# Altium PCB PCB1.PcbDoc
Units mil, origin at the board's own origin, x right, y up, seen from the top; angles counter-clockwise.
Board outline 3838.58 x 1771.65 mil, 2 copper layers (Top Layer, Bottom Layer); 17 components, 11 nets, 40 pads, 0 vias.
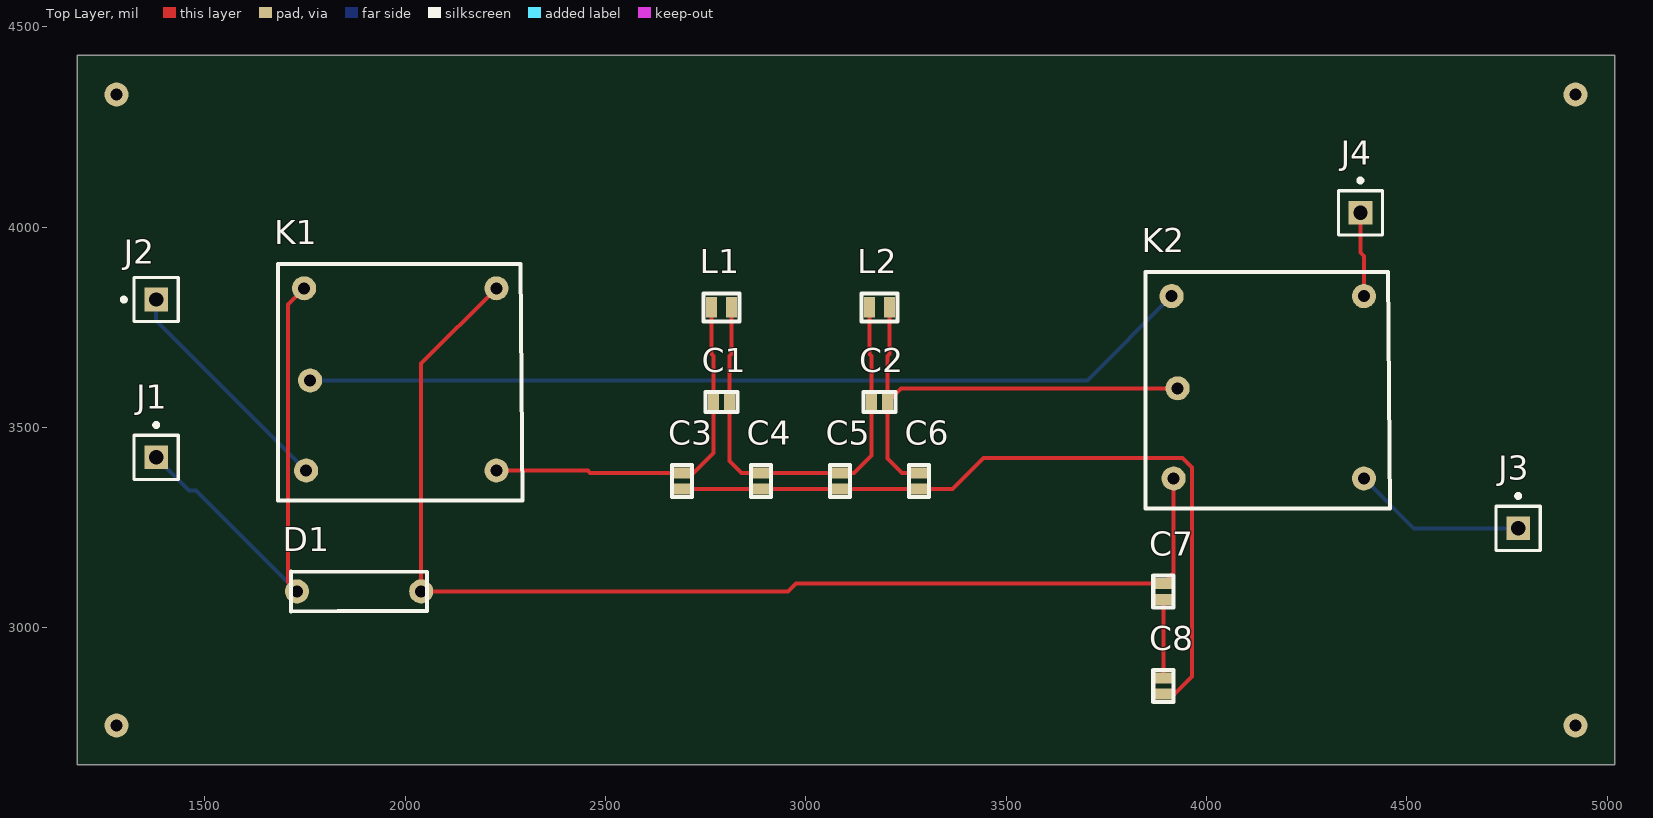
[diagram p0: Top Layer view]
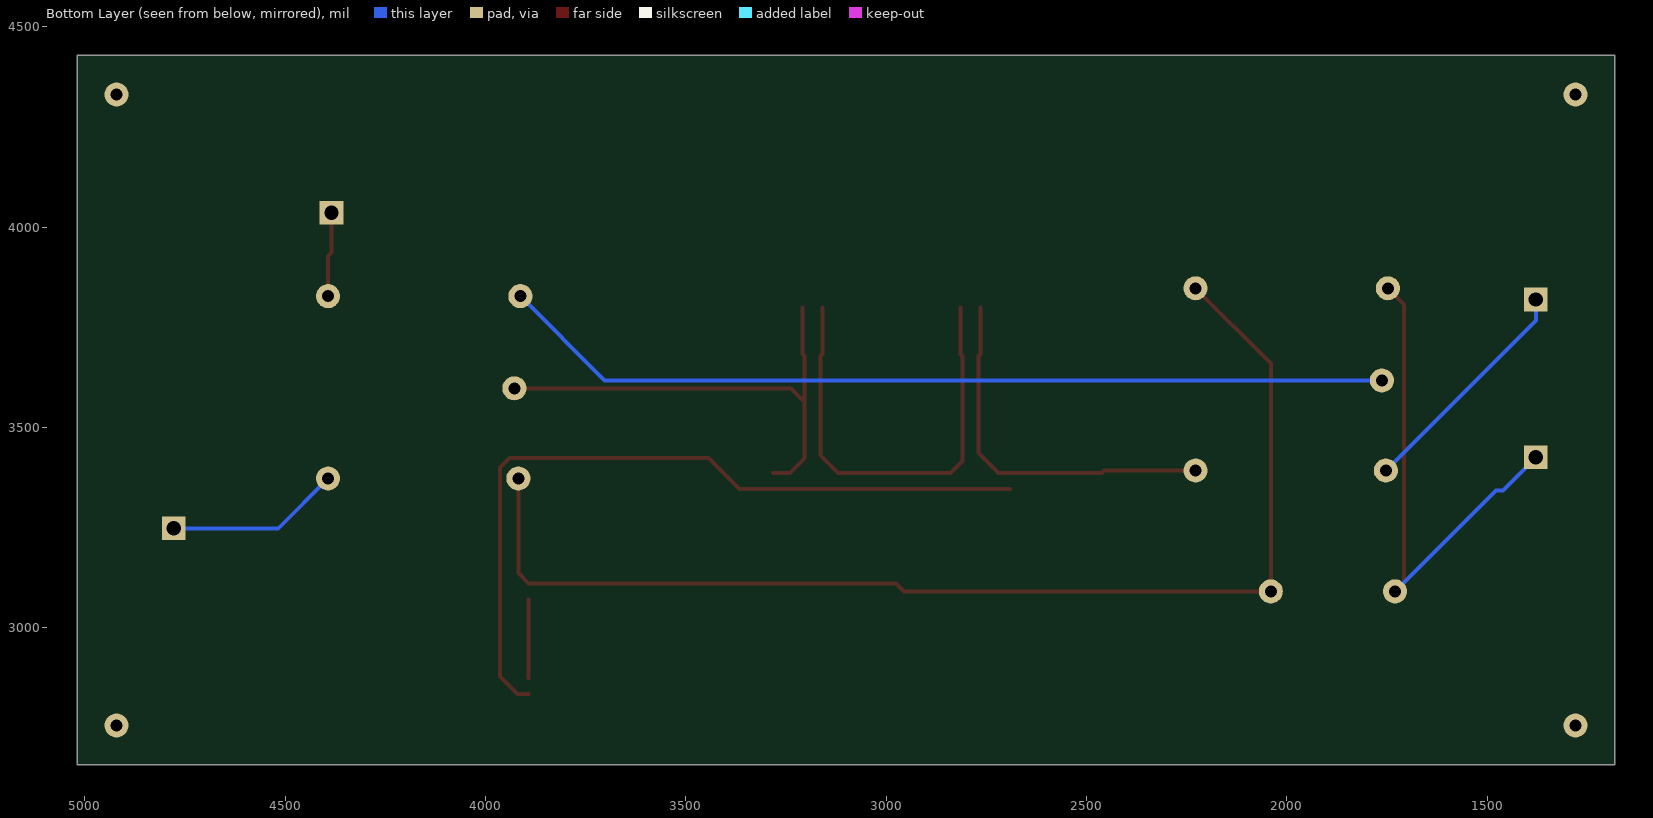
[diagram p1: Bottom Layer view, seen from below]
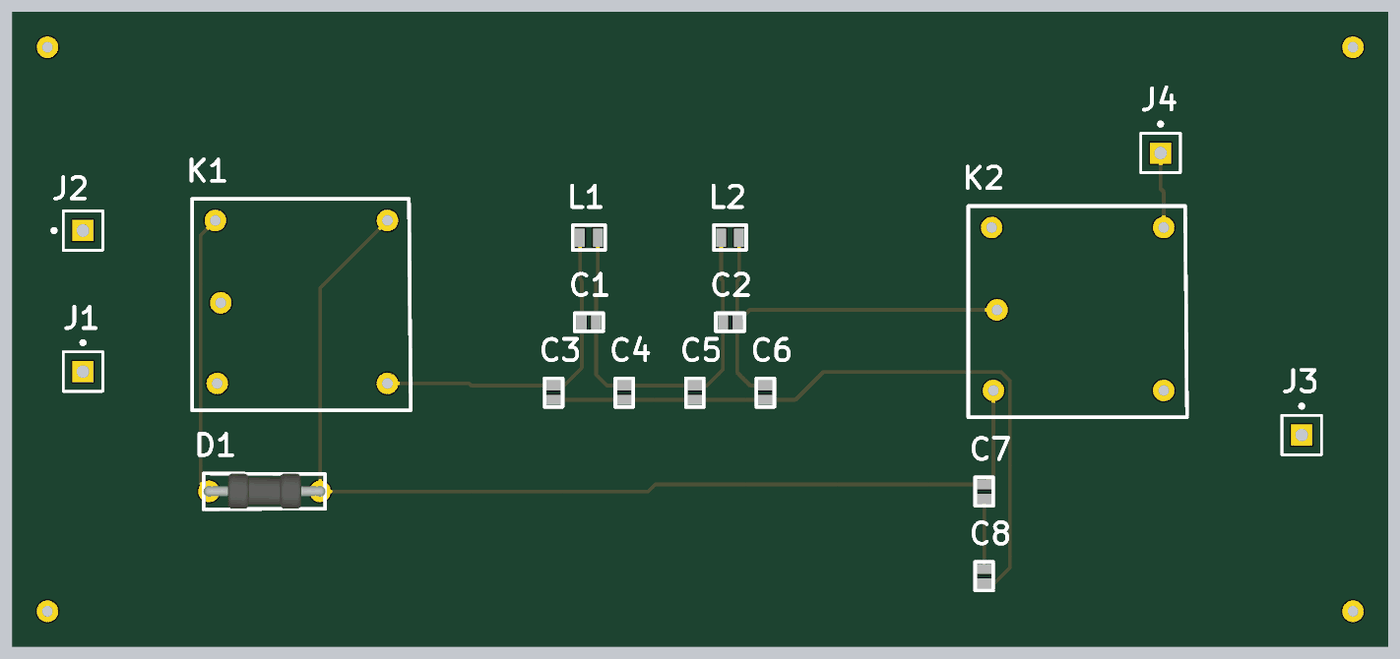
[diagram p2: 3D render of the assembled board from above, using the file's embedded part models]

## Layer stack, top to bottom
Top Solder: solder mask 0.4, Solder Resist, Dk 3.5
Top Layer: signal copper 1.4
Dielectric 1: dielectric 12.6, FR-4, Dk 4.8
Bottom Layer: signal copper 1.4
Bottom Solder: solder mask 0.4, Solder Resist, Dk 3.5

## Board outline
1181.1,2657.48 1181.1,4429.13 5019.69,4429.13 5019.69,2657.48

## Design rules (kind name [scope] priority, off if disabled: settings)
Clearance [All] p1: gap=10 ignorepadtopadclearanceinfootprint=FALSE
PolygonConnect [All] p1: connectstyle=Relief reliefconductorwidth=10 reliefentries=4 polygonreliefangle="90 Angle" airgapwidth=10
RoomDefinition Э3 [InComponentClass('Э3')] p1: confinementstyle=ConfineIn formatcopy=TRUE lockcomponents=FALSE outline 1271.3,2755.59 4915.94,2755.59 4915.94,4330.39 1271.3,4330.39
RoutingVias [All] p1: holewidth=28 width=50 viastyle="Through Hole" minholewidth=28 minwidth=50 maxholewidth=28 maxwidth=50
SolderMaskExpansion [All] p1: expansion=4 istentingtop=FALSE
SupplyNets "Schematic Supply Nets_1" [InNet('NetK1_5')] p1: voltage=0.000
SupplyNets "Schematic Supply Nets" [InNet('GND')] p2: voltage=0.000
Width [All] p1: maxlimit=10 minlimit=10 preferedwidth=10
30 further rules are at their usual default settings.

## Components (designator, comment, footprint, x,y, rotation, side; value= is the part's Value field where it differs from the comment)
C1 "33 пФ-5%-0805" CAPACITOR_SMD0805C 2789.96,3562.99 r0 top
C2 "12 пФ-5%-0805" CAPACITOR_SMD0805C 3183.66,3562.99 r0 top
C3 "68 пФ-5%-0805" CAPACITOR_SMD0805C 2691.53,3366.14 r270 top
C4 "100 пФ-5%-0805" CAPACITOR_SMD0805C 2888.39,3366.14 r270 top
C5 "75пФ-5%-0805" CAPACITOR_SMD0805C 3085.24,3366.14 r270 top
C6 "75пФ-5%-0805" CAPACITOR_SMD0805C 3282.09,3366.14 r270 top
C7 "100пФ-5%-0805" CAPACITOR_SMD0805C 3892.32,3090.24 r270 top
C8 "100пФ-5%-0805" CAPACITOR_SMD0805C 3892.32,2854.02 r270 top
D1 "Diode 1N4007" diod 1909.99,3090.55 r180 top
J1 "Socket" PIN1 1378.5,3425.2 r0 top
J2 "Socket" PIN1 1378.5,3818.9 r90 top
J3 "Socket" PIN1 4778.15,3248.03 r0 top
J4 "Socket" PIN1 4384.45,4035.43 r0 top
K1 "Relay-SPDT" RALEY_IMO3GR 1982.87,3622.05 r0 top
K2 "Relay-SPDT" RALEY_IMO3GR 4148.23,3602.36 r0 top
L1 "0.25μH-20%-HCI1335-R25" INDUCTOR_SMD0805L 2789.96,3799.21 r90 top
L2 "0.31μH-20%-0805-R25" INDUCTOR_SMD0805L 3183.66,3799.21 r270 top value=0.31μH-20%-HCI1335-R25

## Footprints (in the part's own frame and the unit in brackets; to place one, negate y for a bottom-side part, rotate by r counter-clockwise, add the part's x,y. Pads: shape width x height; smd on the part's side, far side on the other; paste and mask are expansions set on the pad)
CAPACITOR_SMD0805C [mm]
  rect 0.7x1.3 smd: 1(-0.508,0) 2(0.508,0)
  silkscreen extent -1.02,-0.63 1.02,0.64, body extent -1,-0.63 1,0.63, height 1.3
diod [mil]
  round 60 hole 30: 1(-130,0) 2(180,0)
  silkscreen extent -144,-50 195,50, body extent -144,-50 194,48, height 207
INDUCTOR_SMD0805L [mm]
  rect 1.3x0.7 smd: 1(0,0.635) 2(0,-0.635)
  silkscreen extent -0.89,-1.14 0.89,1.14, body extent -0.86,-1.14 0.86,1.14, height 1.63
PIN1 [mm] "Connector; Plug"
  rect 1.5x1.5 hole 0.9: 1(0,0)
  silkscreen extent -1.4,-1.4 1.4,2.17
RALEY_IMO3GR [mil]
  round 60 hole 30: 1(-235,225) 2(245,225) 3(-230,-230) 4(245,-230) 5(-220,-5)
  silkscreen extent -300,-305 310,285, body extent -298,-300 308,291, height 740

## Part data
C1: library part Capacitor_SMD0805C, Manufacturer="Murata Electronics", PartNumber=GRM2165C1H330JA01D, Href=https://www.chipdip.ru/product/grm2165c1h100j?from=suggest_product, Vlaue="33 pf-5%-0805"
C2: library part Capacitor_SMD0805C, Manufacturer="Murata Electronics", PartNumber=GRM2195C2D120JV01D, Href=https://www.chipdip.ru/product/grm2165c1h100j?from=suggest_product, Vlaue="12 pf-5%-0805"
C3: library part Capacitor_SMD0805C, Manufacturer="Murata Electronics", PartNumber=GRM2165C1H680JZ01D, Href=https://www.chipdip.ru/product/grm2165c1h100j?from=suggest_product, Vlaue="68 pf-5%-0805"
C4 C7 C8: library part Capacitor_SMD0805C, Manufacturer="Murata Electronics", PartNumber=GRM2165C1H101JA01D
  C4: Href=https://www.chipdip.ru/product/grm2165c1h100j?from=suggest_product, Vlaue="100 pf-5%-0805"
  C7 C8: Href="100пФ NPO 50В 5% 0805, GRM2165C1H101J"
C5 C6: library part Capacitor_SMD0805C, Manufacturer="Murata Electronics", PartNumber=GRM2165C1H750JZ01D, Href=https://www.chipdip.ru/product/grm2165c1h100j?from=suggest_product, Vlaue="75 pf-5%-0805"
K1 K2: Manufacturer=Omron, PartNumber=8007034659, Href=G5LE-1-12V
L1: library part Katushka_SMD0805, Manufacturer="Ferro Core", PartNumber=HCI1335-R25, Href=https://www.tme.eu/en/details/hci1335-r25/inductors/ferrocore/
L2: library part Katushka_SMD0805, Manufacturer="Murata Electronics", Href=https://www.tme.eu/en/details/hci1335-r25/inductors/ferrocore/, PartNumber=https://www.chipdip.ru/product0/8313487384
J1 J2 J3 J4: LatestRevisionDate=17-Jul-2002, LatestRevisionNote="Re-released for DXP Platform.", Publisher="Altium Limited"

## Free pads (board coordinates)
  round 60 hole 30: 4(1279.53,4330.71) 5(4921.26,4330.71) 7(4921.26,2755.91) 8(1279.53,2755.91)

## Nets (pads, with @x,y where several pads share a name; then routed paths per layer and width w, separated by ;. In a path a pad name is that pad's centre, name@x,y a point inside that pad or via, vN(x,y) a via of type N, cw(c..) or ccw(c..) an arc to the next point about the centre after c; other vN are vias at no path point)
GND: C3.2 C4.2 C5.2 C6.2 C8.2 | length 1926.6
  Top Layer w10: C3.2 C4.2 C5.2 C6.2 3366,3346.14 3443.86,3424 3940,3424 3964,3400 3964,2878 3920.01,2834.01 C8.2
NetC1_1: C1.1 C3.1 K1.4 L1.1 | length 930.4
  Top Layer w10: K1.4 2456,3392.05 2461.91,3386.14 C3.1 2720,3386.14 2769.96,3436.1 C1.1 2769.96,3678 2764.96,3683 L1.1
NetC1_2: C1.2 C2.1 C4.1 C5.1 L1.2 L2.2 | length 1140.8
  Top Layer w10: L1.2 2814.96,3683 2809.96,3678 C1.2 2809.96,3416.18 2840,3386.14 C4.1 C5.1 3120,3386.14 3163.66,3429.8 C2.1 3163.66,3678 3158.66,3683 L2.2
NetC2_2: C2.2 C6.1 K2.5 L2.1 | length 1211.3
  Top Layer w10: L2.1 3208.66,3683 3203.66,3678 C2.2 ; C6.1 3239.64,3386.14 3203.66,3422.12 C2.2 ; K2.5 3238.03,3597.36 C2.2
NetC7_1: C7.1 D1.1 K1.2 K2.3 | length 2967.7
  Top Layer w10: K1.2 2039.99,3659.16 D1.1 2956,3090.55 2975.69,3110.24 C7.1 3918.23,3136.14 K2.3
NetC7_2: C7.2 C8.1 | length 196.2
  Top Layer w10: C8.1 C7.2
NetD1_2: D1.2 J1.1 K1.1 | length 1273.1
  Top Layer w10: D1.2 1707,3113.54 1707,3806.17 K1.1
  Bottom Layer w10: J1.1 1461,3342.69 1477.85,3342.69 D1.2
NetJ2_1: J2.1 K1.3 | length 581.9
  Bottom Layer w10: J2.1 1378.49,3766.42 K1.3
NetJ3_1: J3.1 K2.4 | length 436.4
  Bottom Layer w10: K2.4 4517.56,3248.03 J3.1
NetJ4_1: J4.1 K2.2 | length 211.7
  Top Layer w10: J4.1 4384.45,3935.78 4393.23,3927 K2.2
NetK1_5: K1.5 K2.1 | length 2237.5
  Bottom Layer w10: K1.5 3702.91,3617.05 K2.1

## Silkscreen, mask and mechanical layers (free items; w line width, h text height)
Mechanical 1:
  the board outline again, w10